# Altium PCB ImpactNode.PcbDoc
Units mm, origin at the board's own origin, x right, y up, seen from the top; angles counter-clockwise.
Board outline 55.45 x 36 mm, 4 copper layers (L1 (SIgnal), L2 (GND), L3 (GND), L4 (SIgnal)), stack 1.57 mm thick; 42 components, 32 nets, 160 pads, 95 vias.
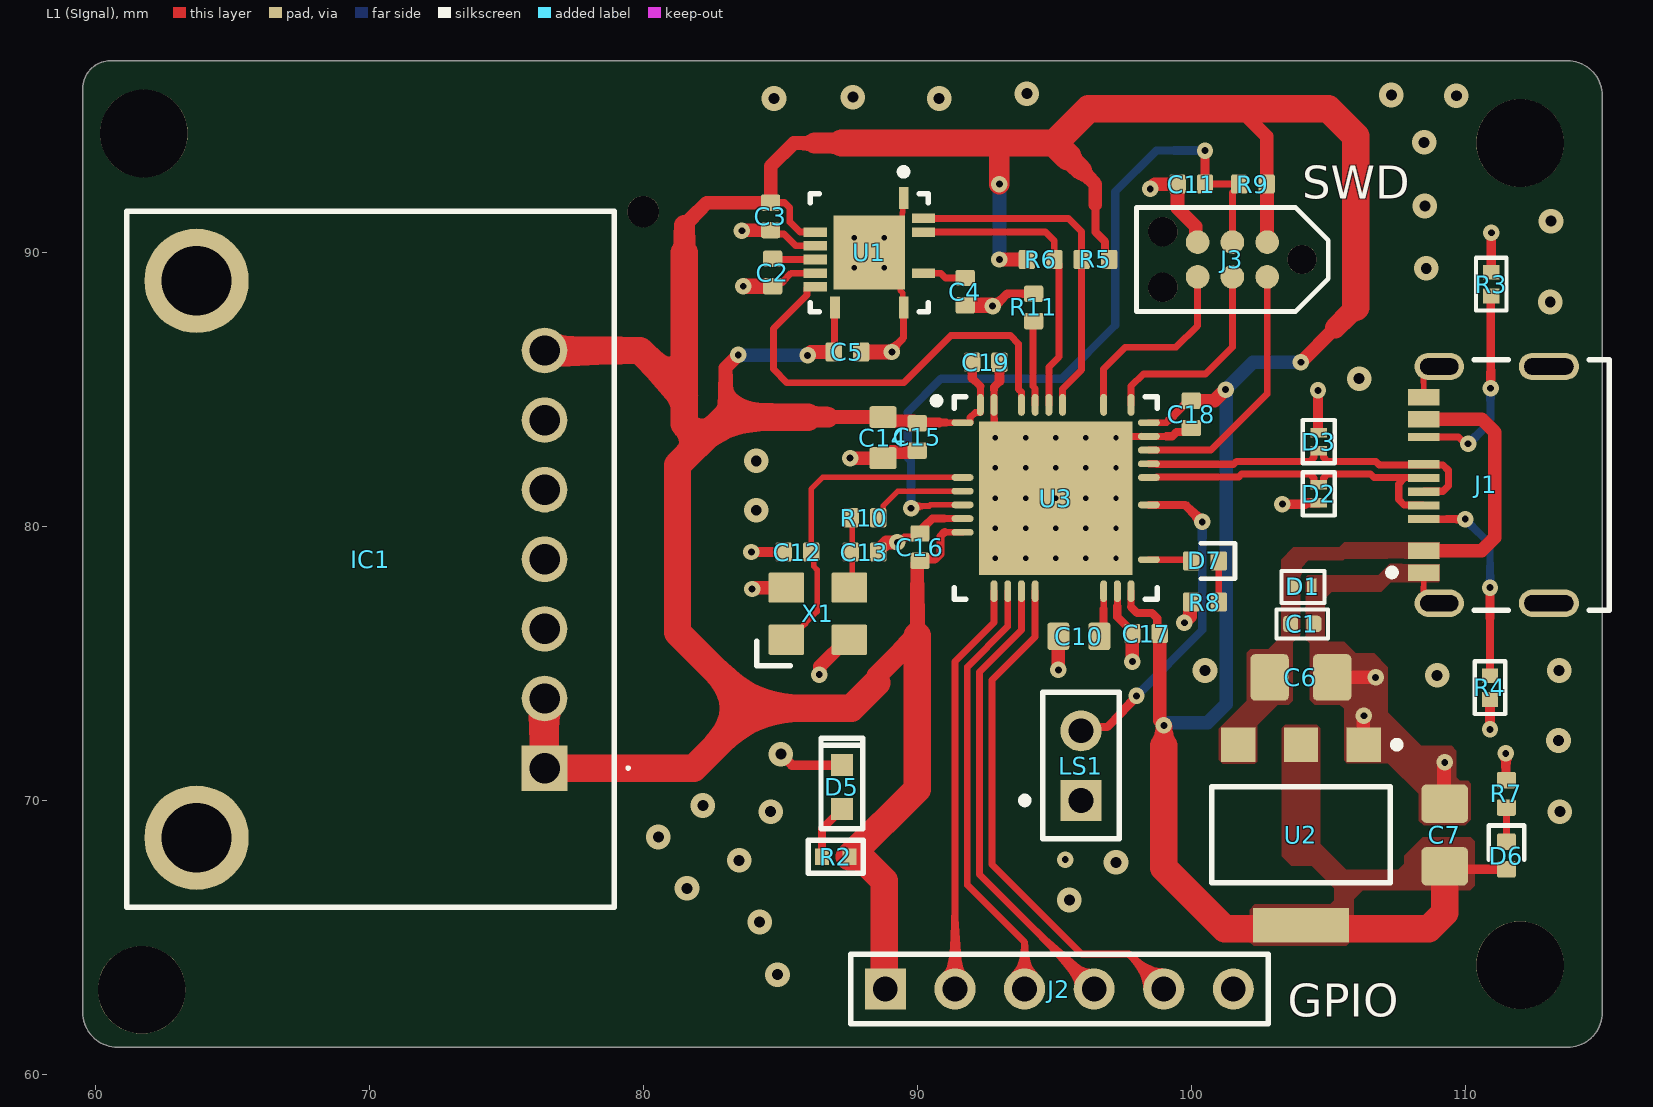
[diagram p0: L1 (SIgnal) view]
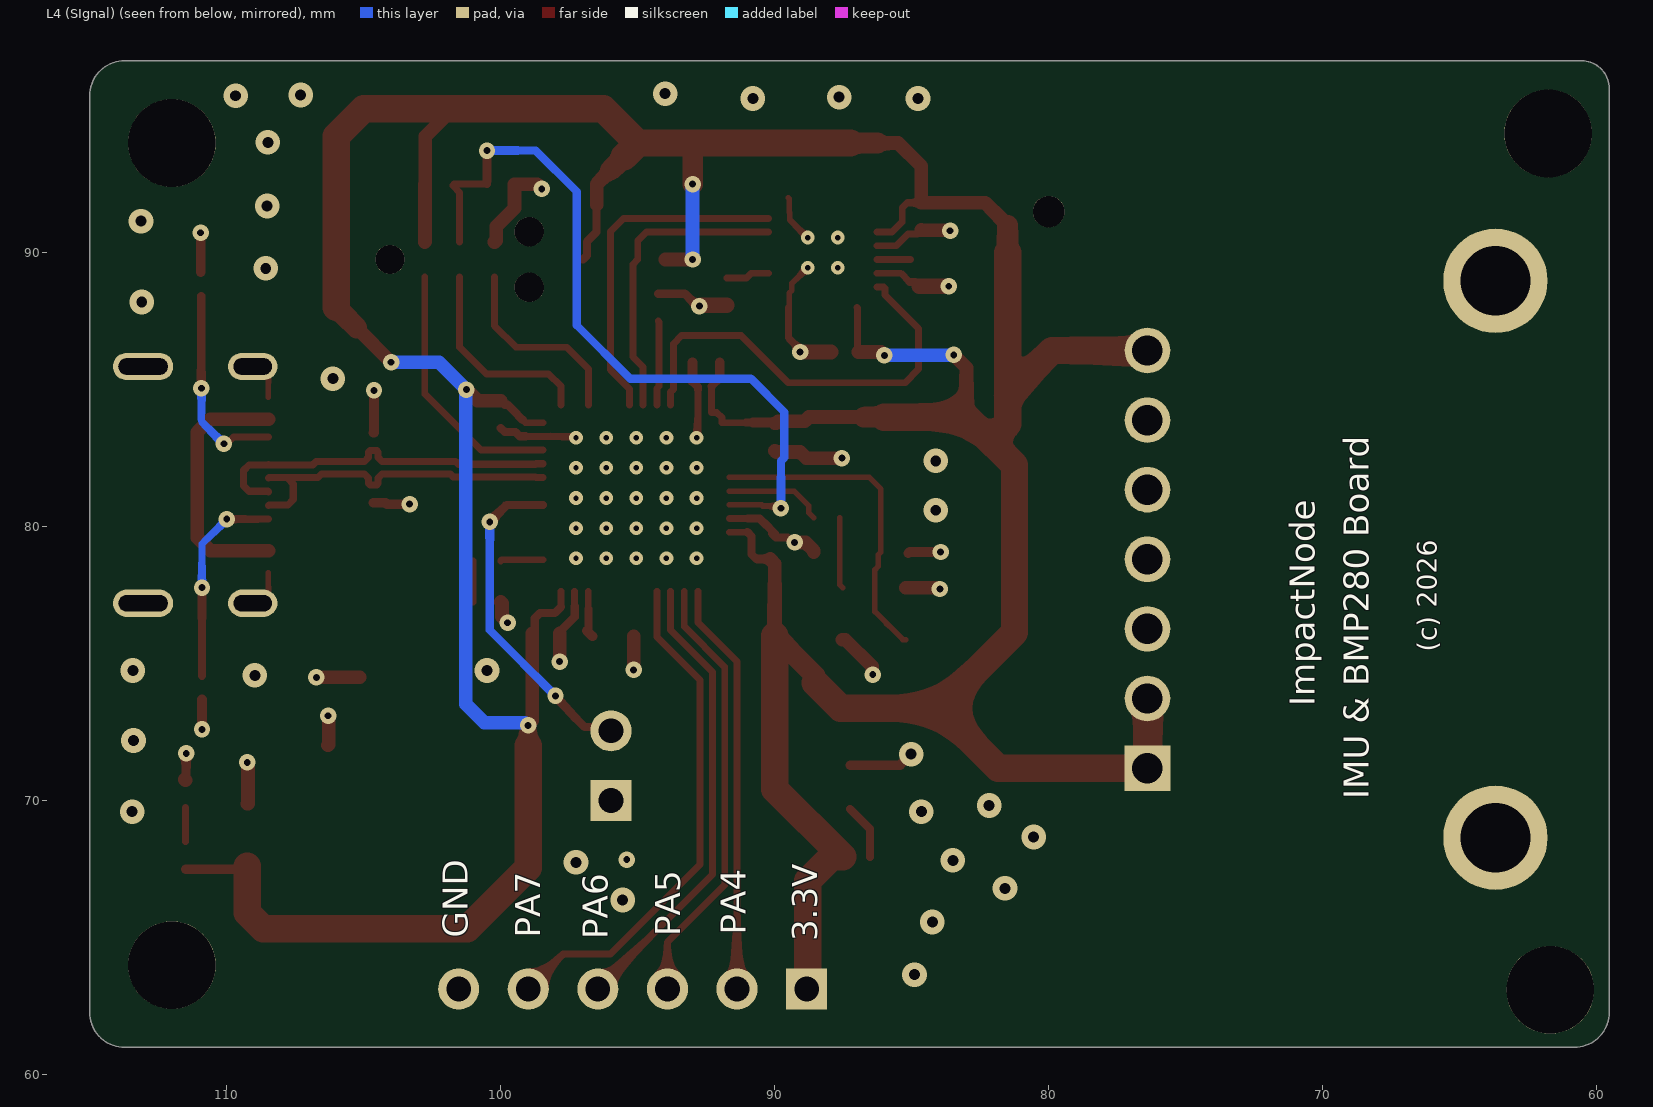
[diagram p1: L4 (SIgnal) view, seen from below]
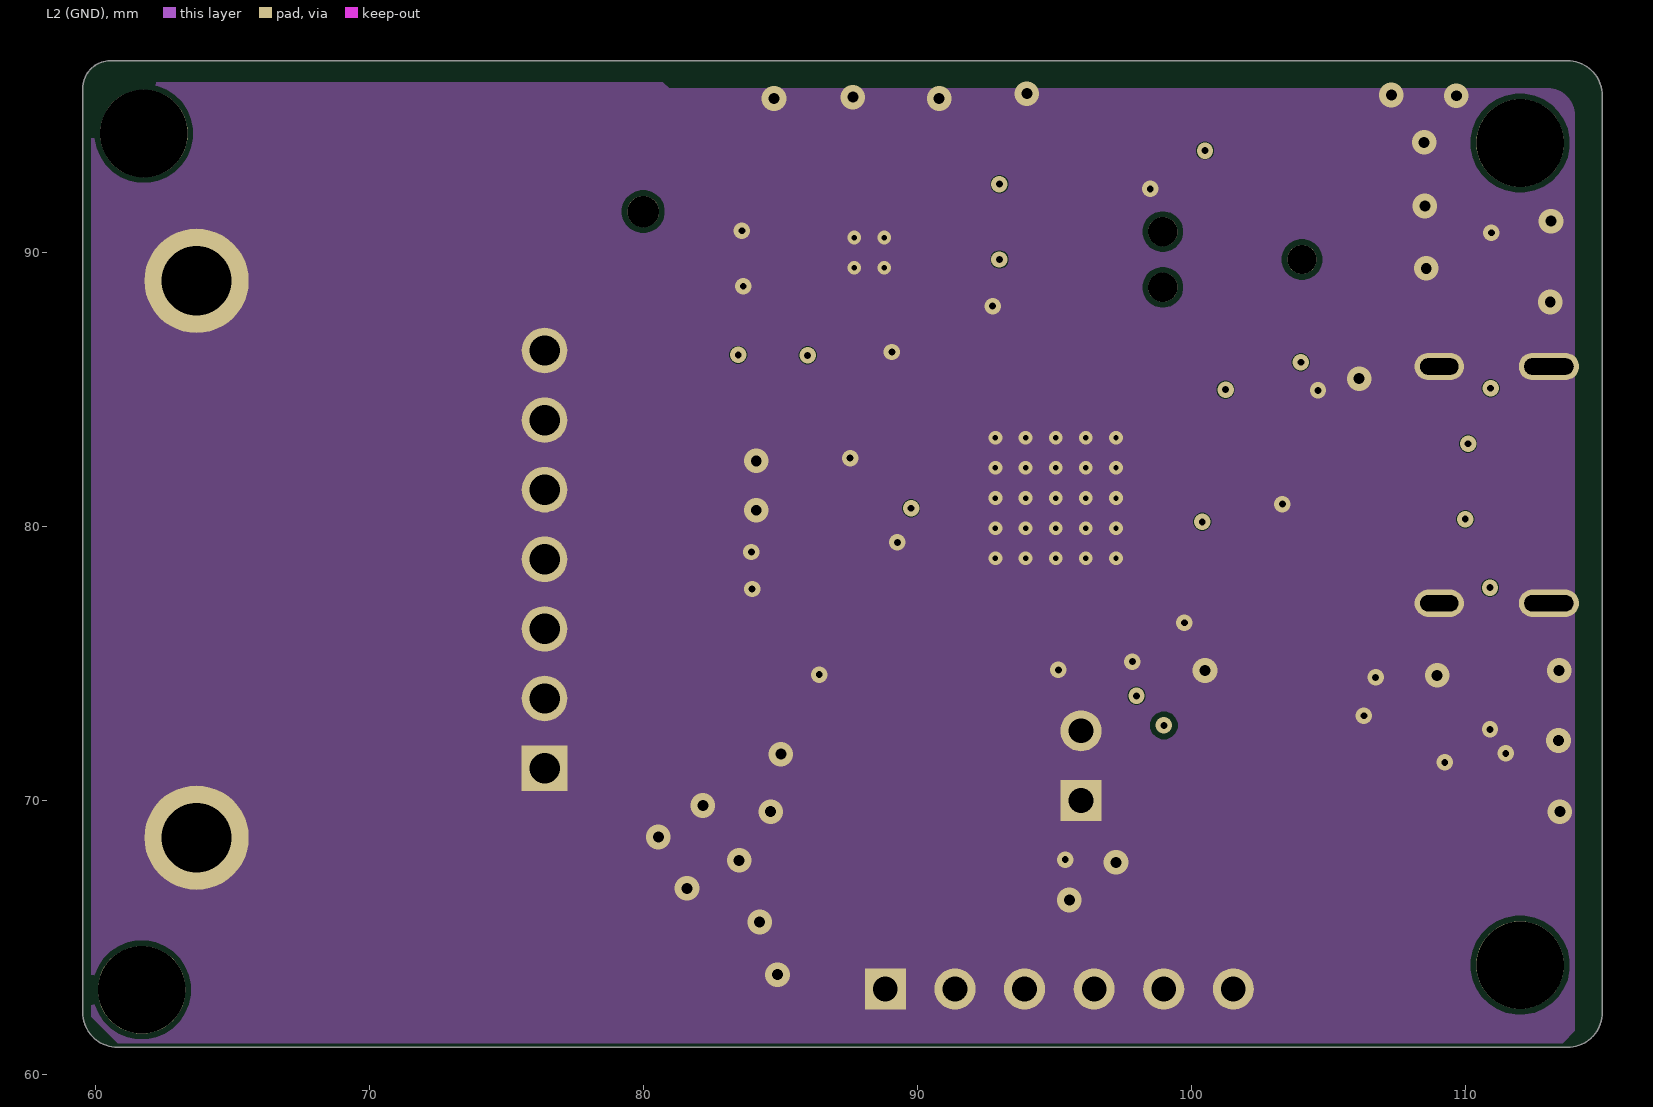
[diagram p2: L2 (GND)]
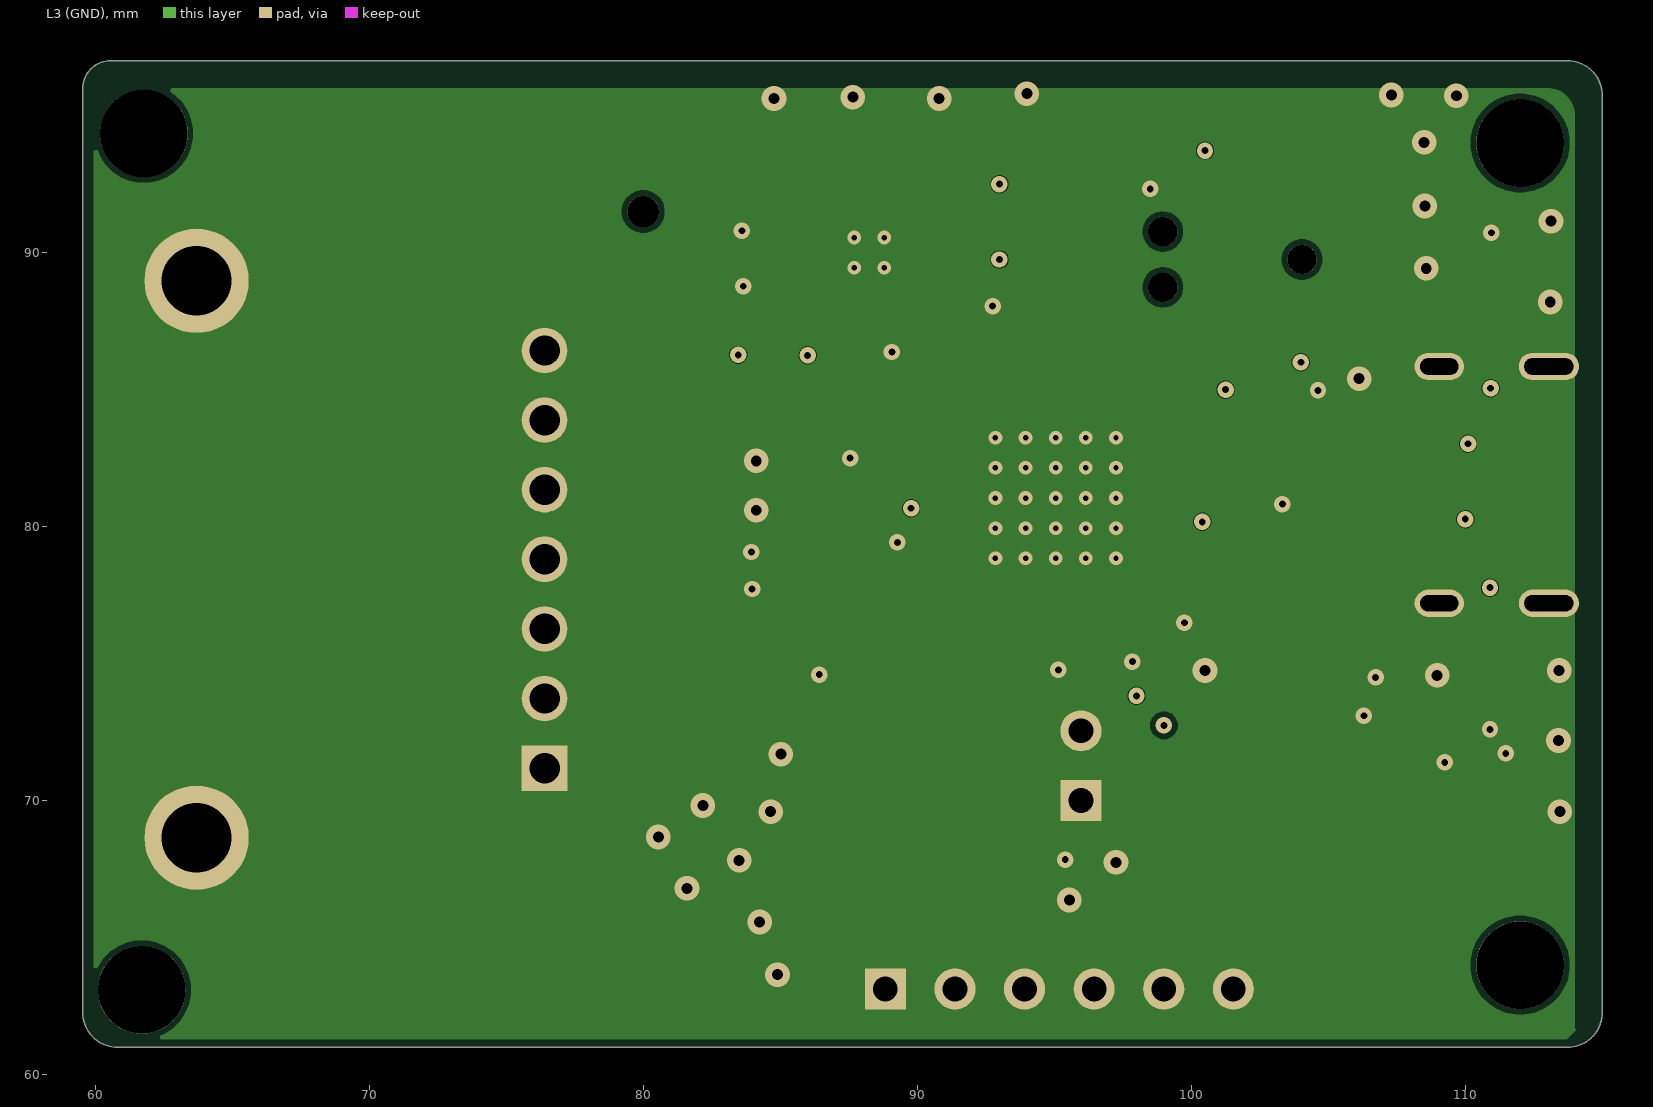
[diagram p3: L3 (GND)]
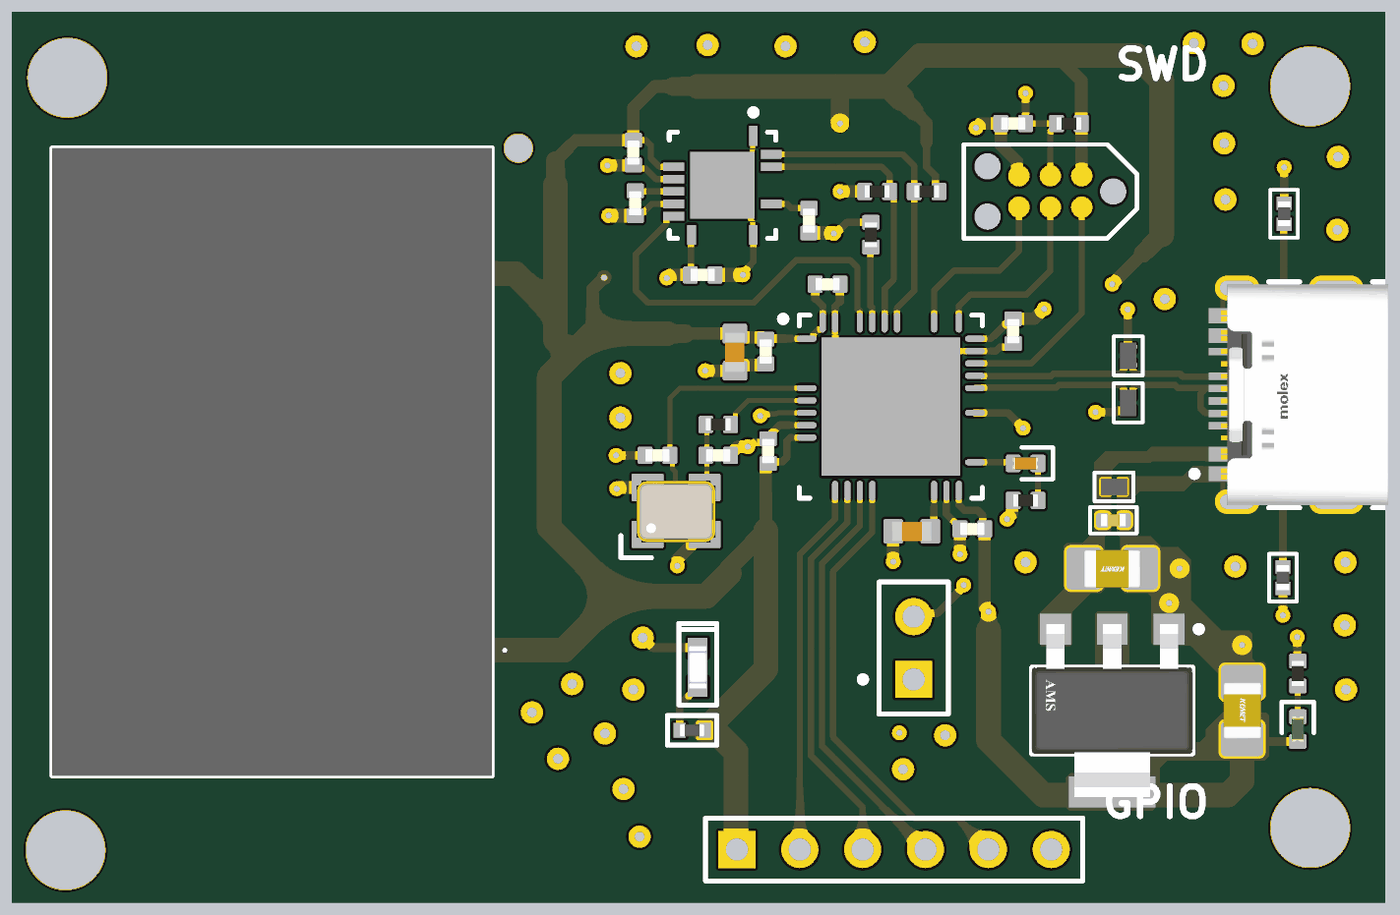
[diagram p4: 3D render of the assembled board from above, using the file's embedded part models]

## Layer stack, top to bottom
Top Solder: solder mask 0.0254, SM-001, Dk 4
L1 (SIgnal): signal copper 0.035
Dielectric 1: prepreg 0.2, PP-017, Dk 4.6
L2 (GND): signal copper 0.0175
Dielectric 3: core 1.065, Core-039, Dk 4.6
L3 (GND): signal copper 0.0175
Dielectric 5: prepreg 0.2, PP-017, Dk 4.6
L4 (SIgnal): signal copper 0.035
Bottom Solder: solder mask 0.0254, SM-001, Dk 4

## Board outline
59.55,62.27 59.55,96 cw(c60.55,96) 60.55,97 60.5,97 113.73,97 cw(c113.73,95.73) 115,95.73 115,62.27 cw(c113.73,62.27) 113.73,61 60.775,61 60.82,61 cw(c60.82,62.27)

## Design rules (kind name [scope] priority, off if disabled: settings)
Clearance [All] p1: gap=0.2 ignorepadtopadclearanceinfootprint=TRUE
DiffPairsRouting [All] p1: maxlimit=0.254 minlimit=0.203 mostfreqgap=0.254 toplayer_maxgap=0.203 toplayer_prefgap=0.203 toplayer_minwidth=0.26 toplayer_maxwidth=0.26 toplayer_prefwidth=0.26 bottomlayer_maxgap=0.203 bottomlayer_prefgap=0.203 bottomlayer_minwidth=0.26 bottomlayer_maxwidth=0.26 bottomlayer_prefwidth=0.26 impedanceprofiledriven=TRUE impedanceprofileid={7F84C1FC-614D-44AF-B792-7ED8B26A1299} impedanceprofilevalue=90.000000 maxuncoupledlength=12.7
HoleSize [All] p1: absolutevalues=TRUE maxlimit=3.5 minlimit=0.025 maxpercent=80.000 minpercent=20.000
MinimumSolderMaskSliver [All] p1: minsoldermaskwidth=0.02
PolygonConnect [All] p1: connectstyle=Direct reliefconductorwidth=0.254 reliefentries=4 polygonreliefangle="90 Angle" airgapwidth=0.254
RoutingVias [All] p1: holewidth=0.3 width=0.7 viastyle="Through Hole" minholewidth=0.25 minwidth=0.55 maxholewidth=0.4 maxwidth=0.9
SilkToSilkClearance [All] p1: silktosilkclearance=0.15
SilkToSolderMaskClearance [IsPad] p1: minsilkscreentomaskgap=0 clearancetoexposedcopper=TRUE
SolderMaskExpansion [All] p1: expansion=0.102 istentingtop=FALSE
UnRoutedNet [All] p1: checkbadconnections=TRUE
Width [All] p1: maxlimit=1 minlimit=0.2 preferedwidth=0.3 midlayer1_minwidth=0.254 midlayer1_maxwidth=0.254 midlayer1_prefwidth=0.254 midlayer2_minwidth=0.254 midlayer2_maxwidth=0.254 midlayer2_prefwidth=0.254 minimp=50.000000 maximp=50.000000 favimp=50.000000
24 further rules are at their usual default settings.

## Classes and differential pairs
differential pair class DIFF_USB: USB_D
differential pair class DIFF90: USB_D
differential pair USB_D: +USB_D_P -USB_D_N

## Components (designator, comment, footprint, x,y, rotation, side; value= is the part's Value field where it differs from the comment)
C1 "100nF, 50V" CAPC1005X55N 104.05,76.45 r180 top value=100nF
C2 "100n" CAP_0402 84.725,89.275 r90 top
C3 "100n" CAP_0402 84.65,91.325 r90 top
C4 "2n2" CAP_0402 91.75,88.575 r90 top
C5 "100n" CAP_0402 87.45,86.375 r180 top
C6 "22u" CAP_0805 104,74.5 r180 top
C7 "22u" CAP_0805 109.25,68.75 r270 top
C10 "2u2" CAP_0603 95.9,76 r0 top
C11 "100n" CAP_0402 100,92.5 r0 top
C12 "10p" CAP_0402 85.625,79.075 r0 top
C13 "10p" CAP_0402 88.075,79.075 r180 top
C14 "2u2" CAP_0603 88.75,83.25 r90 top
C15 "100n" CAP_0402 90,83.275 r90 top
C16 "100n" CAP_0402 90.1,79.25 r270 top
C17 "100n" CAP_0402 98.35,76.1 r0 top
C18 "100n" CAP_0402 100,84.1 r90 top
C19 "100n" CAP_0402 92.5,86 r180 top
D1 "AQ3045-01ETG" SOD882 104.075,77.8 r180 top
D2 "AQ3045-01ETG" SOD882 104.65,81.2 r90 top
D3 "AQ3045-01ETG" SOD882 104.65,83.1 r270 top
D5 "GREEN" LED_0603 87.25,70.5 r270 top
D6 "GREEN" LED_0402_GREEN 111.5,68 r90 top
D7 "RED" LED_0402_RED 100.5,78.75 r0 top
IC1 "Adafruit_BMP280" AdafruitBMP280 76.4,71.19 r90 top
J1 "217179-0001" FP-2171790001-MFG 111.9,81.525 r90 top
J2 "SM06B-GHS-TB" HDR1X6 88.835,63.129 r0 top
J3 "TC2030-NL" TC2030-NL-FP 101.5,89.75 r180 top
LS1 "buzzer" PIN2 95.975,70.01 r90 top
R2 "1kohm" R0402 87.025,67.95 r0 top value=1kR
R3 "5K1" RESC1005X37N 110.95,88.85 r270 top value=5.1kΩ
R4 "5K1" RESC1005X37N 110.9,74.125 r90 top value=5.1kΩ
R5 "2k2" RES_0402 96.5,89.75 r0 top
R6 "2k2" RES_0402 94.5,89.75 r180 top
R7 "1k" RES_0402 111.5,70.25 r270 top
R8 "1k" RES_0402 100.5,77.25 r0 top
R9 "10k" RES_0402 102.25,92.5 r0 top
R10 "0R" RES_0402 88.075,80.325 r0 top
R11 "10k" RES_0402 94.25,88 r270 top
U1 "MPU-6050" IS-QFN-24_V 88.25,90 r270 top
U2 "ams1117" FP-ams1117-IPC_C 104,68.75 r270 top
U3 "STM32F411CEU6" STM-UFQFPN48_L 95.053,81.045 r0 top
X1 "24MHz" XTAL_3225 86.375,76.825 r0 top

## Footprints (in the part's own frame and the unit in brackets; to place one, negate y for a bottom-side part, rotate by r counter-clockwise, add the part's x,y. Pads: shape width x height; smd on the part's side, far side on the other; paste and mask are expansions set on the pad)
AdafruitBMP280 [mm]
  rect 1.665x1.665 hole 1.11: 1(0,0)
  round 1.665 hole 1.11: 2(2.54,0) 3(5.08,0) 4(7.62,0) 5(10.16,0) 6(12.7,0) 7(15.24,0)
  round 3.81 hole 2.54: MH1(-2.54,12.7) MH2(17.78,12.7)
  silkscreen extent -5.08,-3.1 20.32,15.24, body extent -5.08,-2.54 20.32,15.24, height 3
CAP_0402 [mm]
  rrect25% 0.6x0.7 smd: 1(-0.5,0) 2(0.5,0)
  body extent -0.5,-0.26 0.5,0.26, height 0.37
CAP_0603 [mm]
  rrect25% 0.8x1 smd: 1(-0.75,0) 2(0.75,0)
  body extent -0.8,-0.4 0.8,0.4, height 0.51
CAP_0805 [mm]
  rrect25% 1.4x1.7 smd: 1(-1.143,0) 2(1.143,0)
  body extent -1.15,-0.76 1.15,0.79, height 1.01
CAPC1005X55N [mm]
  rrect53% 0.54x0.6 smd: 1(-0.43,0) 2(0.43,0)
  silkscreen extent -0.94,-0.53 0.94,0.53, body extent -0.5,-0.25 0.5,0.25, height 0.55
FP-2171790001-MFG [mm]
  rect 0.6x1.15 smd paste+0 mask+0: A1B12(-3.2,3.425) A4B9(-2.4,3.425) B1A12(3.2,3.425) B4A9(2.4,3.425)
  rect 0.3x1.15 smd paste+0 mask+0: A5(-1.25,3.425) A6(-0.25,3.425) A7(0.25,3.425) B5(1.75,3.425) B6(0.75,3.425) B7(-0.75,3.425)
  rrect100% 1x1.8 hole 1.4 slot 0.6 at 0 deg paste-2539.97 mask+0: S1(-4.32,2.85) S2(4.32,2.85)
  rrect100% 1x2.2 hole 1.8 slot 0.6 at 0 deg paste-2539.97 mask+0: S3(-4.32,-1.15) S4(4.32,-1.15)
  silkscreen extent -4.57,-3.35 4.57,4.7, body extent -4.92,-3.45 4.92,4.1, height 0.25
FP-ams1117-IPC_C [mm]
  rect 1.25x1.25 smd paste+0 mask+0: 1(-3.295,2.29) 2(-3.295,0) 3(-3.295,-2.29)
  rect 1.25x3.5 smd paste+0 mask+0: 4(3.295,0)
  silkscreen extent -3.42,-3.25 1.75,3.63, body extent -3.9,-3.35 3.9,3.35, height 0.25
HDR1X6 [mm] "Connector; Header; 6 Position"
  rect 1.5x1.5 hole 0.9: 1(0,0)
  round 1.5 hole 0.9: 2(2.54,0) 3(5.08,0) 4(7.62,0) 5(10.16,0) 6(12.7,0)
  silkscreen extent -1.27,-1.27 13.97,1.27
IS-QFN-24_V [mm] "QFN, 24-Leads, Body 4x4mm, Pitch 0.5mm, Thermal Pad 2.7x2.6mm"
  rect 0.8x0.35 smd: 1(-2,1.25) 13(2,-1.25) 18(2,1.25)
  rect 0.35x0.85 smd mask+0.102: 8(-0.75,-1.975) 9(-0.25,-1.975) 10(0.25,-1.975) 11(0.75,-1.975) 12(1.25,-1.975) 20(0.75,1.975) 23(-0.75,1.975) 24(-1.25,1.975)
  rect 2.7x2.6 smd: 25(0,0)
  silkscreen extent -3.07,-2.15 2.15,2.15, body extent -2,-2 2,2, height 0.95
LED_0402_GREEN [mm]
  rrect25% 0.6x0.7 smd: A(-0.5,0) K(0.5,0)
  silkscreen extent -0.15,-0.65 1.1,0.65, body extent -0.51,-0.25 0.51,0.25, height 0.45
LED_0402_RED [mm]
  rrect25% 0.6x0.7 smd: A(-0.5,0) K(0.5,0)
  silkscreen extent -0.15,-0.65 1.1,0.65, body extent -0.51,-0.25 0.51,0.25, height 0.45
LED_0603 [mm]
  rect 0.8x0.8 smd: 1(-0.8,0) 2(0.8,0)
  silkscreen extent -1.78,-0.76 1.52,0.76, body extent -0.85,-0.4 0.85,0.4, height 0.66
PIN2 [mm] "Photosensitive Diode; 2 Leads"
  rect 1.5x1.5 hole 0.9: 1(0,0)
  round 1.5 hole 0.9: 2(2.54,0)
  silkscreen extent -1.4,-1.4 3.94,2.17
R0402 [mm]
  rect 0.5x0.6 smd: 1(-0.5,0) 2(0.5,0)
  silkscreen extent -1,-0.6 1,0.6, body extent -0.5,-0.25 0.5,0.25, height 0.4
RES_0402 [mm]
  rrect25% 0.6x0.7 smd: 1(-0.5,0) 2(0.5,0)
  body extent -0.5,-0.25 0.5,0.25, height 0.3
RESC1005X37N [mm]
  rect 0.54x0.6 smd: 1(-0.432,0) 2(0.432,0)
  silkscreen extent -0.97,-0.56 0.97,0.56, body extent -0.5,-0.25 0.5,0.25, height 0.37
SOD882 [mm]
  rect 0.35x0.6 smd: 1(-0.325,0) 2(0.325,0)
  silkscreen extent -0.79,-0.58 0.79,0.58, body extent -0.54,-0.34 0.54,0.34, height 0.44
STM-UFQFPN48_L [mm] "QFN, 48-Leads, Body 7.1x7.1mm, Pitch 0.5mm, Thermal Pad 5.6x5.6mm, IPC High Density"
  oval 0.8x0.25 smd: 1(-3.4,2.75) 5(-3.4,0.75) 6(-3.4,0.25) 7(-3.4,-0.25) 8(-3.4,-0.75) 9(-3.4,-1.25) 26(3.4,-2.25) 30(3.4,-0.25) 32(3.4,0.75) 33(3.4,1.25) 34(3.4,1.75) 35(3.4,2.25) 36(3.4,2.75)
  oval 0.25x0.8 smd: 14(-2.25,-3.4) 15(-1.75,-3.4) 16(-1.25,-3.4) 17(-0.75,-3.4) 22(1.75,-3.4) 23(2.25,-3.4) 24(2.75,-3.4) 37(2.75,3.4) 39(1.75,3.4) 42(0.25,3.4) 43(-0.25,3.4) 44(-0.75,3.4) 45(-1.25,3.4) 47(-2.25,3.4) 48(-2.75,3.4)
  rect 5.6x5.6 smd: 49(0,0)
  silkscreen extent -4.47,-3.7 3.7,3.7, body extent -3.55,-3.55 3.55,3.55, height 0.6
TC2030-NL-FP [mil]
  round 33.98 smd paste-16.99: 1(-50,-25) 2(-50,25) 3(0,-25) 4(0,25) 5(50,-25) 6(50,25)
  round 42.01 hole 42.01 unplated: MH(-100,0) MH(100,-40) MH(100,40)
  silkscreen extent -138,-75 138,75
XTAL_3225 [mm]
  rrect10% 1.3x1.1 smd: 1(-1.15,-0.95) 2(1.15,-0.95) 3(1.15,0.95) 4(-1.15,0.95)
  silkscreen extent -2.23,-1.89 -1,-1, body extent -1.6,-1.28 1.6,1.22, height 0.61

## Part data
C1: library part CL05B104KB5NNNC, "CAP CER 0.1UF 50V X7R 0402", Case/Package=0402, Dielectric=X7R, Dielectric Material=Ceramic, Manufacturer="Samsung Electro-Mechanics", Max Operating Temperature=125°C, Min Operating Temperature=-55°C, Supplier Part Number=1276-CL05B104KB5NNNCCT-ND, Tolerance=10%, Voltage Rating=50V, Category="Ceramic Capacitors", China RoHS=Compliant, ComponentLink1Description=https://datasheet.octopart.com:443/CL05B104KB5NNNC-Samsung-Electro-Mechanics-datasheet-141346860.pdf?src-supplier=IHS, ComponentLink1URL=https://datasheet.octopart.com:443/CL05B104KB5NNNC-Samsung-Electro-Mechanics-datasheet-141346860.pdf?src-supplier=IHS, ComponentLink2Description=https://datasheet.octopart.com:443/CL05B104KB5NNNC-Samsung-datasheet-97040617.pdf?src-supplier=Future+Electronics, ComponentLink2URL=https://datasheet.octopart.com:443/CL05B104KB5NNNC-Samsung-datasheet-97040617.pdf?src-supplier=Future+Electronics, ComponentLink3Description=https://datasheet.octopart.com:443/CL05B104KB5NNNC-Samsung-datasheet-8326407.pdf?src-supplier=TME, ComponentLink3URL=https://datasheet.octopart.com:443/CL05B104KB5NNNC-Samsung-datasheet-8326407.pdf?src-supplier=TME, Height=550µm, LCSC Part Number=CL05B104KB5NNNC, Lifecycle Status=Production, Manufacturer Part Number=CL05B104KB5NNNC, Material=Ceramic, Mounting Technology="Surface Mount", Number of Terminals=2, Pricing="1=0.08, 10=0.010, 50=0.0088, 100=0.008 (USD)", REACH SVHC=Yes, RoHS=Compliant, Stock=1636938, Supplier=DigiKey, Voltage Rating (DC)=50V
C2 C3 C4 C12 C13: library part CAP_0402, "Capacitor SMD 0402 16V"
C5 C11 C15 C16 C17 C18 C19: library part CAP_0402, "Capacitor SMD 0402"
C6 C7: library part CAP_0805, "Capacitor SMD 0805 16V"
C10 C14: library part CAP_0603, "Capacitor SMD 0603"
D1 D2 D3: "Bi 30Kv 5V 0.35Pf Automotve Tvs Sod882/ T&r Rohs Compliant: Yes", Breakdown Voltage=7.8V, Clamping Voltage=12V, Leakage Current=100nA, Manufacturer=Littelfuse, Max Breakdown Voltage=9V, Max Operating Temperature=150°C, Min Breakdown Voltage=6.8V, Min Operating Temperature=-40°C, Operating Supply Voltage=5.3V, Peak Pulse Power=40W, Supplier Part Number=F9321CT-ND, Category="TVS Diodes", ComponentLink1Description=https://datasheet.octopart.com:443/AQ3045-01ETG-Littelfuse-datasheet-180606588.pdf?src-supplier=IHS, ComponentLink1URL=https://datasheet.octopart.com:443/AQ3045-01ETG-Littelfuse-datasheet-180606588.pdf?src-supplier=IHS, ComponentLink2Description=https://datasheet.octopart.com:443/AQ3045-01ETG-Littelfuse-datasheet-140480283.pdf?src-supplier=ODG+(Origin+Data+Global), ComponentLink2URL=https://datasheet.octopart.com:443/AQ3045-01ETG-Littelfuse-datasheet-140480283.pdf?src-supplier=ODG+(Origin+Data+Global), ComponentLink3Description=https://datasheet.octopart.com:443/AQ3045-01ETG-Littelfuse-datasheet-101609968.pdf?src-supplier=Farnell, ComponentLink3URL=https://datasheet.octopart.com:443/AQ3045-01ETG-Littelfuse-datasheet-101609968.pdf?src-supplier=Farnell, ComponentLink4Description=https://datasheet.octopart.com:443/AQ3045-01ETG-Littelfuse-datasheet-183003566.pdf?src-supplier=JRH+Electronics, ComponentLink4URL=https://datasheet.octopart.com:443/AQ3045-01ETG-Littelfuse-datasheet-183003566.pdf?src-supplier=JRH+Electronics, ComponentLink5Description=https://datasheet.octopart.com:443/AQ3045-01ETG-Littelfuse-datasheet-170904929.pdf?src-supplier=Future+Electronics, ComponentLink5URL=https://datasheet.octopart.com:443/AQ3045-01ETG-Littelfuse-datasheet-170904929.pdf?src-supplier=Future+Electronics, Lifecycle Status=Production, Manufacturer Part Number=AQ3045-01ETG, Mounting Technology="Surface Mount", Number of Channels=1, Number of Elements=1, Number of Terminals=2, Packaging="Cut Tape", Peak Reverse Current=100nA, Polarity=Bidirectional, Pricing="1=0.43, 10=0.271, 100=0.141, 500=0.131 (USD)", REACH SVHC=Yes, Reverse Standoff Voltage=5.3V, RoHS=Compliant, Stock=11182, Supplier=DigiKey
D5: library part VLMG1500-GS08, "Single Color LED, Yellow Green, 0.5mm", Color=Green,Yellow, Color@wavelength=Green, Forward Current=30mA, Forward Voltage=2.4V, LCSC Part Number=C511404, Manufacturer=Vishay, Max Operating Temperature=85°C, Min Operating Temperature=-30°C, Reverse Voltage-Max=5V, Supplier Part Number=VLMG1500-GS08DKR-ND, Category=LEDs, Channels=1, ComponentLink1Description=https://datasheet.ciiva.com:443/pdfs/VipMasterIC/IC/VISH/VISH-S-A0003457490/VISH-S-A0003457490-1.pdf?src-supplier=IHS+Markit, ComponentLink1URL=https://datasheet.ciiva.com:443/pdfs/VipMasterIC/IC/VISH/VISH-S-A0003457490/VISH-S-A0003457490-1.pdf?src-supplier=IHS+Markit, ComponentLink2Description=https://datasheet.ciiva.com/12071/vlmo1500-244705-12071911.pdf?src-supplier=Mouser, ComponentLink2URL=https://datasheet.ciiva.com/12071/vlmo1500-244705-12071911.pdf?src-supplier=Mouser, ComponentLink3Description=https://datasheet.ciiva.com/13945/vlmo1500-13945360.pdf?src-supplier=Digikey, ComponentLink3URL=https://datasheet.ciiva.com/13945/vlmo1500-13945360.pdf?src-supplier=Digikey, ComponentLink4Description=https://datasheet.ciiva.com/30005/vlmo1500-30005134.pdf?src-supplier=Avnet, ComponentLink4URL=https://datasheet.ciiva.com/30005/vlmo1500-30005134.pdf?src-supplier=Avnet, ComponentLink5Description=https://datasheet.ciiva.com/13945/vlmo1500-13945358.pdf?src-supplier=Digikey, ComponentLink5URL=https://datasheet.ciiva.com/13945/vlmo1500-13945358.pdf?src-supplier=Digikey, ComponentLink6Description=https://datasheet.ciiva.com/13945/vlmo1500-13945359.pdf?src-supplier=Digikey, ComponentLink6URL=https://datasheet.ciiva.com/13945/vlmo1500-13945359.pdf?src-supplier=Digikey, Luminous Intensity-Nom=90mcd, Manufacturer Part Number=VLMG1500-GS08, Mounting Technology="Surface Mount", Optoelectronic Device Type="SINGLE COLOR LED", Overall Height=0.35mm, Packaging="Tape and Reel", Pins=2, Pricing="1=0.33, 10=0.189, 100=0.1166, 500=0.08838, 1000=0.07977 (USD)", Reach SVHC Compliant=Yes, RoHS=Yes, RoHS Compliant=Yes, Shape=Rectangular, Size=0.5mm, Stock=48646, Supplier=Digikey, Terminal Pitch=0.95mm, Viewing Angle=130°
D6: library part LED_0402_GREEN, "LED 0402 GREEN SMD"
D7: library part LED_0402_RED, "LED 0402 RED SMD"
IC1: "Adafruit BMP280 Barometric Pressure + Temperature Sensor Breakout", Manufacturer_Name=Adafruit, Manufacturer_Part_Number="Adafruit BMP280", Description_="Adafruit BMP280 Barometric Pressure + Temperature Sensor Breakout", Height=2.9, Supplier=https://cdn-learn.adafruit.com/downloads/pdf/adafruit-bmp280-barometric-pressure-plus-temperature-sensor-breakout.pdf
J1: "USB Connector, USB Type C, USB 2.0, Receptacle, 16 Ways, Surface Mount, Through Hole Mount", Contact Resistance=50mΩ, Current Rating=1.25A, Dielectric Material=Polyamide, Insulation Resistance=100MΩ, LCSC Part Number=C3197684, Manufacturer=Molex, Max Operating Temperature=85°C, Min Operating Temperature=-40°C, Supplier Part Number=900-2171790001DKR-ND, Voltage Rating=30V, Category="USB Connectors", ComponentLink1Description=https://datasheet.octopart.com:443/217179-0001-Molex-datasheet-158871109.pdf?src-supplier=ODG+(Origin+Data+Global), ComponentLink1URL=https://datasheet.octopart.com:443/217179-0001-Molex-datasheet-158871109.pdf?src-supplier=ODG+(Origin+Data+Global), ComponentLink2Description=https://sigma.octopart.com:443/158871110/technical_drawing/Molex-217179-0001.pdf?src-supplier=Upverter, ComponentLink2URL=https://sigma.octopart.com:443/158871110/technical_drawing/Molex-217179-0001.pdf?src-supplier=Upverter, ComponentLink3Description=https://datasheet.octopart.com:443/217179-0001-Molex-datasheet-164573281.pdf?src-supplier=RS+(Formerly+Allied+Electronics), ComponentLink3URL=https://datasheet.octopart.com:443/217179-0001-Molex-datasheet-164573281.pdf?src-supplier=RS+(Formerly+Allied+Electronics), ComponentLink4Description=http://sigma.octopart.com:80/conflict_mineral_statement/Molex-company-72.pdf?src-supplier=Compliance+Statements, ComponentLink4URL=http://sigma.octopart.com:80/conflict_mineral_statement/Molex-company-72.pdf?src-supplier=Compliance+Statements, ComponentLink5Description=http://sigma.octopart.com:80/rohs_statement/Molex-company-73.pdf?src-supplier=Compliance+Statements, ComponentLink5URL=http://sigma.octopart.com:80/rohs_statement/Molex-company-73.pdf?src-supplier=Compliance+Statements, ComponentLink6Description=http://sigma.octopart.com:80/reach_statement/Molex-company-74.pdf?src-supplier=Compliance+Statements, ComponentLink6URL=http://sigma.octopart.com:80/reach_statement/Molex-company-74.pdf?src-supplier=Compliance+Statements, Contact Gender=Female, Contact Material="Gold, Nickel", Gender=Receptacle, Height=3.36mm, Lifecycle Status=Production, Manufacturer Part Number=217179-0001, Number of Contacts=16, Number of Ports=1, Number of Rows=1, Pins=16, Pricing="1=0.83, 10=0.704, 25=0.6596, 50=0.628, 100=0.598, 250=0.56052, 500=0.53374 (USD)", REACH SVHC=Yes, RoHS=Compliant, Shell Finish=Nickel, Shell Material="Stainless Steel", Stock=29627, Supplier=DigiKey, Terminal Pitch=500µm, Usb Standard="USB 2.0"
J2: "Header Connector 6 Position 1.25MM Pitch SMD Horizontal JST GH", Manufacturer=JST, Manufacturer Part Number=SM06B-GHS-TB
J3: "Tag-Connect No-Solder SWD Debug Connector (No Legs) DO NOT PLACE", Manufacturer=Tag-Connect, Manufacturer Part Number=TC2030-NL-FP
LS1: library part Bell, "Buzzer", LatestRevisionDate=17-Jul-2002, LatestRevisionNote="Re-released for DXP Platform.", PackageReference=PIN2, Published=24-Mar-1999, Publisher="Altium Limited"
R2: library part RC0402FR-071KL, "RES 1K OHM 1% 1/16W 0402", Case/Package=0402, LCSC Part Number=C106235, Manufacturer=Yageo, Max Operating Temperature=155°C, Min Operating Temperature=-55°C, Package Height=0.35mm, Package Length=1mm, Package Shape=Rectangular, Package Width=0.5mm, Power=62.5mW, Rated Temperature=70°C, Resistor Type="FIXED RESISTOR", Supplier Part Number=311-1.00KLRCT-ND, Temperature Coefficient (ppm/Cel)=100, Tolerance=1%, Working Voltage=50V, Additional Feature="LASER TRIMMABLE", Category="Chip SMD Resistors", ComponentLink1Description=https://datasheet.ciiva.com:443/pdfs/VipMasterIC/IC/YAGO/YAGO-S-A0008145938/YAGO-S-A0008145938-1.pdf?src-supplier=IHS+Markit, ComponentLink1URL=https://datasheet.ciiva.com:443/pdfs/VipMasterIC/IC/YAGO/YAGO-S-A0008145938/YAGO-S-A0008145938-1.pdf?src-supplier=IHS+Markit, ComponentLink2Description=https://datasheet.ciiva.com/11819/0900766b80c66297-11819477.pdf?src-supplier=Rs, ComponentLink2URL=https://datasheet.ciiva.com/11819/0900766b80c66297-11819477.pdf?src-supplier=Rs, ComponentLink3Description=https://datasheet.ciiva.com/7849/1018594-7849869.pdf?src-supplier=Element14, ComponentLink3URL=https://datasheet.ciiva.com/7849/1018594-7849869.pdf?src-supplier=Element14, ComponentLink4Description=https://datasheet.ciiva.com/7849/1018594-7849871.pdf?src-supplier=Element14, ComponentLink4URL=https://datasheet.ciiva.com/7849/1018594-7849871.pdf?src-supplier=Element14, ComponentLink5Description=https://datasheet.ciiva.com/7983/1018594-7983502.pdf?src-supplier=Element14, ComponentLink5URL=https://datasheet.ciiva.com/7983/1018594-7983502.pdf?src-supplier=Element14, ComponentLink6Description=https://datasheet.ciiva.com/22747/1018594-22747513.pdf?src-supplier=Element14, ComponentLink6URL=https://datasheet.ciiva.com/22747/1018594-22747513.pdf?src-supplier=Element14, ComponentLink7Description=https://datasheet.ciiva.com/17063/pyu-rc0402-51-rohs-l-6-r-17063193.pdf?src-supplier=Future+Electronics, ComponentLink7URL=https://datasheet.ciiva.com/17063/pyu-rc0402-51-rohs-l-6-r-17063193.pdf?src-supplier=Future+Electronics, ComponentLink8Description=https://datasheet.ciiva.com/12666/pyu-rc0402-51-rohs-l-6-r-12666741.pdf?src-supplier=Mouser, ComponentLink8URL=https://datasheet.ciiva.com/12666/pyu-rc0402-51-rohs-l-6-r-12666741.pdf?src-supplier=Mouser, Construction=Chip, JESD-609 Code=e3, Manufacturer Part Number=RC0402FR-071KL, Mounting Technology="Surface Mount", Packaging="Tape and Reel", Pins=2, Pricing="1=0.1, 10=0.007, 100=0.0061, 1000=0.0051, 2500=0.00408 (USD)", Reach SVHC Compliant=Yes, RoHS=Yes, RoHS Compliant=Yes, Stock=1739365, Supplier=Digikey, Technology="METAL GLAZE/THICK FILM", Terminal Finish=Nickel, Termination=Wraparound
R3 R4: library part AC0402FR-075K1L, "Res Thick Film 0402 5.1K Ohm 1% 0.063W(1/16W) ±100ppm/C Pad SMD Automotive T/R", Case Code (Imperial)=0402, Case Code (Metric)=1005, LCSC Part Number=C144745, Manufacturer="Yageo Group", Max Operating Temperature=155°C, Max Power Dissipation=63mW, Min Operating Temperature=-55°C, Power Dissipation=62.5mW, Supplier Part Number=YAG3503CT-ND, Temperature Coefficient=100ppm/°C, Tolerance=1%, Voltage Rating=50V, Case/Package=0402, Category="Chip SMD Resistors", China RoHS=Non-Compliant, ComponentLink1Description=https://datasheet.octopart.com:443/AC0402FR-075K1L-Yageo-datasheet-182189377.pdf?src-supplier=IHS, ComponentLink1URL=https://datasheet.octopart.com:443/AC0402FR-075K1L-Yageo-datasheet-182189377.pdf?src-supplier=IHS, ComponentLink2Description=https://datasheet.octopart.com:443/AC0402FR-075K1L-Yageo-datasheet-83209224.pdf?src-supplier=Upverter, ComponentLink2URL=https://datasheet.octopart.com:443/AC0402FR-075K1L-Yageo-datasheet-83209224.pdf?src-supplier=Upverter, ComponentLink3Description=https://datasheet.octopart.com:443/AC0402FR-075K1L-Yageo-datasheet-178509465.pdf?src-supplier=Newark, ComponentLink3URL=https://datasheet.octopart.com:443/AC0402FR-075K1L-Yageo-datasheet-178509465.pdf?src-supplier=Newark, ComponentLink4Description=https://datasheet.octopart.com/AC0402FR-075K1L-Yageo-datasheet-12512238.pdf, ComponentLink4URL=https://datasheet.octopart.com/AC0402FR-075K1L-Yageo-datasheet-12512238.pdf, ComponentLink5Description=https://datasheet.octopart.com:443/AC0402FR-075K1L-Yageo-datasheet-166720450.pdf?src-supplier=Future+Electronics, ComponentLink5URL=https://datasheet.octopart.com:443/AC0402FR-075K1L-Yageo-datasheet-166720450.pdf?src-supplier=Future+Electronics, ComponentLink6Description=https://datasheet.octopart.com:443/AC0402FR-075K1L-Yageo-datasheet-151884373.pdf?src-supplier=Future+Electronics, ComponentLink6URL=https://datasheet.octopart.com:443/AC0402FR-075K1L-Yageo-datasheet-151884373.pdf?src-supplier=Future+Electronics, ComponentLink7Description=https://datasheet.octopart.com:443/AC0402FR-075K1L-Yageo-datasheet-137699919.pdf?src-supplier=Future+Electronics, ComponentLink7URL=https://datasheet.octopart.com:443/AC0402FR-075K1L-Yageo-datasheet-137699919.pdf?src-supplier=Future+Electronics, ComponentLink8Description=https://datasheet.octopart.com:443/AC0402FR-075K1L-Yageo-datasheet-24580492.pdf?src-supplier=Future+Electronics, ComponentLink8URL=https://datasheet.octopart.com:443/AC0402FR-075K1L-Yageo-datasheet-24580492.pdf?src-supplier=Future+Electronics, ComponentLink9Description=https://datasheet.octopart.com:443/AC0402FR-075K1L-Yageo-datasheet-13029202.pdf?src-supplier=Future+Electronics, ComponentLink9URL=https://datasheet.octopart.com:443/AC0402FR-075K1L-Yageo-datasheet-13029202.pdf?src-supplier=Future+Electronics, ComponentLink10Description=https://datasheet.octopart.com:443/AC0402FR-075K1L-Yageo-Group-datasheet-164768995.pdf?src-supplier=ODG+(Origin+Data+Global), ComponentLink10URL=https://datasheet.octopart.com:443/AC0402FR-075K1L-Yageo-Group-datasheet-164768995.pdf?src-supplier=ODG+(Origin+Data+Global), ComponentLink11Description=http://sigma.octopart.com:80/rohs_statement/Yageo-company-2.pdf?src-supplier=Compliance+Statements, ComponentLink11URL=http://sigma.octopart.com:80/rohs_statement/Yageo-company-2.pdf?src-supplier=Compliance+Statements, ComponentLink12Description=http://sigma.octopart.com:80/conflict_mineral_statement/Yageo-company-3.pdf?src-supplier=Compliance+Statements, ComponentLink12URL=http://sigma.octopart.com:80/conflict_mineral_statement/Yageo-company-3.pdf?src-supplier=Compliance+Statements, Composition="Thick Film", Depth=500µm, Features="Automotive AEC-Q200, Moisture Resistant", Height=320µm, Lead Free="Lead Free", Length=990.6µm, Lifecycle Status=Production, Manufacturer Part Number=AC0402FR-075K1L, Military Standard=Not, Mounting Technology="Surface Mount", Number of Terminals=2, Number of Terminations=2, Power Rating=62.5mW, Pricing="1=0.1, 10=0.009, 25=0.008, 50=0.0072, 100=0.0066, 250=0.00576, 500=0.00406 (USD)", REACH SVHC=Yes, RoHS=Compliant, Schedule B="8533210045, 8533210045|8533210045|8533210045|8533210045|8533210045|8533210045|8533210045|8533210045|8533210045|8533210045|8533210045|8533210045|8533210045|8533210045|8533210045|8533210045|8533210045|8533210045|8533210045|8533210045|8533210045|8533210045|8533210045|85", Stock=29422, Supplier=DigiKey, Width=500µm, Working Voltage=50V
R5 R6 R7 R8 R9 R11: library part RES_0402, "Resistor SMD 0402"
R10: library part RES_0402, "Resistor SMD 0402 0R"
U1: library part CMP-1753-00002-2, "3-Axis Gyroscope, Accelerometer and a Digital Motion Processor(TM) (DMP), 2.375 to 3.46 V, -40 to 85 degC, 24-Pin QFN, RoHS, Tape and Reel", Manufacturer=InvenSense, Standard Package=5,000, Category=Sensors,Transducers, Datasheet URL=http://datasheet.octopart.com/MPU-6050-InvenSense-datasheet-14421344.pdf, Datasheet Version="Rev. 3.3, 05/2012", Dynamic Catalog=MPU-6000™Series, Family=Multifunction, Featured Product=MPU-60506-Axis,IntegratedI²CSolution, Manufacturer URL=http://www.invensense.com/, Online Catalog=MPU-6000™Series, Other Names="1428-1007-2 / MPU6050", Output Type=Digital, Sensor Type=MotionTracking, Unit PriceUSD=Digital
U2: library part CMP-209535-000002-1, "1A LOW DROPOUT VOLTAGE REGULATOR", RoHS Compliant=Yes
U3: library part CMP-0243-00165-1, "ARM Cortex-M4 32-bit MCU+FPU, 512 KB Flash, 128 KB RAM, 36 I/Os, 48-Pin UFQFPN, -40 to 85 degC, Tray", I/Os (High Current)=36, Operating Frequency(F) (Processor speed) (MHz)=100, Package Description=UFQFPN48, Package Reference="48-Pin Ultra Thin Fine Pitch Quad Flat No-Lead, 7 x 7 x 0.6 mm Body, 0.5 mm Pitch, Exposed Pad", Supply Voltage(Vcc) min (V)=1.7, ComponentLink1Description="Manufacturer URL", ComponentLink1URL=http://www.st.com/, ComponentLink2Description=Datasheet, ComponentLink2URL=http://www.st.com/st-web-ui/static/active/en/resource/technical/document/datasheet/DM00115249.pdf, Core="ARM Cortex-M4", DatasheetVersion="Rev. 6", FLASH Size (Prog) (kB)=512, Internal RAM Size (kB)=128, Mounting Technology="Surface Mount", Packing=Tray
X1: library part TSX-3225_24.0000MF15X-AC, "Crystal SMD 24MHz 10PPM 7pF 3225", Manufacturer=Epson, Manufacturer Part Number="TSX-3225 24.0000MF15X-AC"

## Free pads (board coordinates)
  round 3.2 hole 3.2: MH(61.7,63.1) MH(61.775,94.35) MH(112,64) MH(112,94)
  round 1.152 hole 1.152: TH(80,91.5)

## Via types
v1: diameter 0.6, hole 0.25, L1 (SIgnal) to L4 (SIgnal), 37 vias
v2: diameter 0.9, hole 0.4, L1 (SIgnal) to L4 (SIgnal), 29 vias
v3: diameter 0.5, hole 0.2, L1 (SIgnal) to L4 (SIgnal), 29 vias

## Nets (pads, with @x,y where several pads share a name; then routed paths per layer and width w, separated by ;. In a path a pad name is that pad's centre, name@x,y a point inside that pad or via, vN(x,y) a via of type N, cw(c..) or ccw(c..) an arc to the next point about the centre after c; other vN are vias at no path point)
+3V3: C3.2 C5.2 C7.2 C14.2 C15.2 C16.2 C17.2 C18.2 C19.2 D6.A IC1.1 IC1.2 IC1.7 J2.1 J3.1 R2.2 R5.2 R6.2 R9.2 U1.8 U1.13 U2.2 U2.4 U3.1 U3.9 U3.24 U3.36 U3.48 | length 184.9
  L1 (SIgnal) w0.25: C3.2 85.15,91.825 85.35,91.625 85.35,91.115 85.715,90.75 U1.8 ; C5.2 86.975,86.4 86.975,87.975 U1.13 ; 91,79.8 91.005,79.795 U3.9 ; 91.05,83.8 91.055,83.795 U3.1 91.928,83.795 91.928,83.979 92.118,84.17 92.303,84.17 U3.48 92.303,85.12 92.3,85.122 ; 97.8,77.075 97.803,77.078 U3.24 ; U3.36 99.095,83.795 99.2,83.9 ; C7.2 C7.2@109.357,67.5
  L1 (SIgnal) w0.3: C16.2@90.168,78.818 90.674,78.818 90.85,78.994 90.85,79.65 91,79.8 ; 90.8,83.8 91.05,83.8 ; 92,85.425 92.3,85.125 92.3,85.122 ; 96.5,91.75 96.5,90.75 96.85,90.4 96.85,89.9 R5.2 ; 97.8,77.075 98.025,76.85 98.567,76.85 98.762,76.655 98.762,76.188 C17.2 ; 99.2,83.901 99.549,84.25 ; 99.55,84.25 99.75,84.45 99.85,84.45 C18.2
  L1 (SIgnal) w0.35: C15.2 90.025,83.8 90.8,83.8 ; 92,85.425 C19.2 ; C7.2@109.357,67.5 D6.A
  L1 (SIgnal) w0.5: 81.5,91 82.325,91.825 C3.2 84.65,93.15 85.5,94 86.25,94 ; 83,84 83,85.8 v1(83.468,86.268) ; v1(86,86.25) 86.125,86.375 C5.2 ; 86.75,84 C14.2 88.9,83.85 89.875,83.85 89.95,83.775 C15.2 ; 90,76.025 90,78.65 C16.2 C16.2@90.168,78.818 ; v1(93,89.75) R6.2 ; 96,93 96.5,92.5 96.5,91.75 ; C17.2 98.85,72.927 99,72.777 v1(99,72.75) ; C18.2 100.85,84.6 v1(101.25,85) ; 102,95 102.75,94.25 R9.2 102.76,92.49 102.76,90.395 J3.1 ; v1(104,86) 105.25,87.25
  L1 (SIgnal) w0.6: 99,72 v1(99,72.75)
  L1 (SIgnal) w0.75: 81.5,90 81.5,91 ; 86,84 86.75,84 ; 86.25,94 87.25,94 ; 88.525,74.3 88.525,74.55 89.417,75.442 90,76.025 ; v1(93,92.5) 93,94 ; 95.5,93.5 96,93 ; 105.25,87.25 106,88
  L1 (SIgnal) w1: IC1.2 IC1.1 81.84,71.19 84.025,73.375 ; IC1.7 79.87,86.43 81.5,84.8 ; 81.5,90 81.5,84.8 ; 86,84 83,84 82.125,83.125 ; 87.25,94 93,94 95,94 ; 88.525,74.3 87.6,73.375 84.025,73.375 ; J2.1@88.875,63.129 88.8,63.204 88.8,67.075 87.925,67.95 R2.2 90,70.425 90,76.025 ; 95.5,93.5 95,94 ; 99,72 99,67.55 101.22,65.33 108.664,65.33 109.25,65.916 C7.2 ; 106,88 106,94.25 105.2,95.05 105,95.25 102.25,95.25 96.25,95.25 95,94 ; 81.5,84.8 81.5,83.75 82.125,83.125 ; 82.125,83.125 81.25,82.25 81.25,76.15 84.025,73.375
  L4 (SIgnal) w0.5: v1(83.468,86.268) 83.476,86.259 85.991,86.259 v1(86,86.25) ; v1(93,89.75) v1(93,92.5) ; v1(99,72.75) 99.027,72.75 99.127,72.85 100.6,72.85 101.275,73.525 101.275,84.904 101.269,84.91 101.269,84.981 v1(101.25,85) ; v1@101.231,84.981 102.25,86 v1(104,86)
+5V: C1.2 C6.2 D1.2 J1.A4B9 J1.B4A9 U2.3 | length 9.4
  L1 (SIgnal) w0.5: J1.A4B9 110.6,79.125 111.075,79.6 111.075,83.45 110.6,83.925 J1.B4A9
GND: C1.1 C2.1 C3.1 C4.1 C5.1 C6.1 C7.1 C10.1 C11.1 C12.1 C13.1 C14.1 C15.1 C16.1 C17.1 C18.1 C19.1 D1.1 D2.1 D3.1 D5.1 IC1.3 IC1.5 IC1.MH1 IC1.MH2 J1.A1B12 J1.B1A12 J1.S1 J1.S2 J1.S3 J1.S4 J2.6 J3.5 LS1.1 R3.1 R4.1 R7.1 R8.1 R11.1 U1.1 U1.9 U1.11 U1.18 U1.25 U2.1 U3.8 U3.23 U3.35 U3.47 U3.49 X1.2 X1.4 | length 55.6
  L1 (SIgnal) w0.2: v3(88.8,89.45) 89.375,88.875 89.375,88.625 89.475,88.524 89.475,88.025 U1.18 ; v3(88.8,90.55) 89.45,91.2 89.45,91.451 89.475,91.476 89.475,91.975 U1.1 ; J1.A1B12 108.475,77.596 108.866,77.205 J1.S1 ; J1.B1A12 108.475,85.454 108.866,85.845 J1.S2
  L1 (SIgnal) w0.25: C3.1 84.793,90.682 85.143,90.682 85.575,90.25 U1.9 ; 85.075,88.925 85.4,89.25 U1.11 ; v1(89.075,86.375) 89.075,86.47 89.5,86.895 U1.18 ; 90.975,80.3 90.98,80.295 U3.8 ; 92.8,85 92.803,84.997 U3.47 92.803,83.295 v3(92.853,83.245) ; v3(97.253,83.245) 97.303,83.295 U3.35 99.095,83.295 99.1,83.3 ; 97.3,77.1 97.303,77.103 U3.23
  L1 (SIgnal) w0.3: C2.1 84.875,88.925 85.075,88.925 ; v1(89.275,79.425) 89.356,79.425 89.531,79.6 89.95,79.6 C16.1 ; C16.1@90,79.75 90.55,80.3 90.975,80.3 ; v1(92.75,88.05) 92.831,88.05 93.281,88.5 R11.1 ; 92.8,85 92.8,85.1 93,85.3 ; 97.3,77.1 97.3,76.7 C17.1@97.85,76.15 ; 99.1,83.3 99.307,83.3 99.457,83.45 99.85,83.45 C18.1 ; v1(111.475,71.725) 111.488,71.712 111.488,70.813 R7.1@111.525,70.775
  L1 (SIgnal) w0.35: v1(83.95,79.075) 85.075,79.075 C12.1@85.125,79.025 ; v2(85.025,71.7) 85.425,71.3 D5.1 ; 93,85.3 C19.1 ; v1(103.325,80.825) 104.15,80.825 104.2,80.875 D2.1 ; v1(104.625,84.975) 104.625,83.425 D3.1 ; v1(110.9,72.6) R4.1 ; R3.1 v1(110.95,90.725)
  L1 (SIgnal) w0.5: v1(83.6,90.8) 83.612,90.813 84.638,90.813 C3.1 ; v1(83.975,77.725) 84.002,77.725 84.052,77.775 X1.4 ; v1(86.425,74.6) 86.444,74.619 86.444,74.894 87.425,75.875 X1.2 ; v1(87.55,82.5) C14.1 88.85,82.5 89.075,82.725 89.95,82.725 C15.1 ; C13.1 88.575,79.125 88.875,79.425 v1(89.275,79.425) ; v1(95.15,74.775) C10.1 ; v1@95.375,67.85 v1(95.4,67.85) ; v1(97.85,75.075) C17.1 ; v1(98.5,92.325) 98.675,92.5 C11.1 99.5,91.617 100.161,90.956 100.161,90.439 100.2,90.4 100.215,90.4 J3.5 ; v1(99.75,76.494) 99.75,76.521 99.95,76.721 99.95,77.2 R8.1 ; C6.1 v1(106.725,74.5) ; U2.1@106.29,72.035 U2.1 ; U2.1@106.3,72.025 106.275,72.05 106.275,73.125 v1(106.3,73.1) ; C7.1 109.232,69.893 109.225,69.9 109.225,71.375 v1(109.25,71.4) ; R7.1 R7.1@111.525,70.775
  L1 (SIgnal) w0.56: v1(83.65,88.775) C2.1 ; C5.1 v1(89.075,86.375) ; C4.1 92.714,88.075 92.739,88.05 v1(92.75,88.05)
  other v2: 84.9,63.65 84.25,65.575 95.55,66.375 81.6,66.8 97.25,67.75 83.5,67.825 80.55,68.675 84.65,69.6 113.45,69.6 82.175,69.825 113.4,72.2 108.975,74.575 100.5,74.75 113.425,74.75 84.125,80.6 84.125,82.4 106.125,85.4 113.1,88.2 108.575,89.425 113.125,91.15 108.525,91.7 108.5,94.025 84.775,95.625 90.8,95.625 87.65,95.675 109.675,95.725 107.3,95.75 94,95.8
  other v3: 92.853,78.845 93.953,78.845 95.053,78.845 96.153,78.845 97.253,78.845 92.853,79.945 93.953,79.945 95.053,79.945 96.153,79.945 97.253,79.945 92.853,81.045 93.953,81.045 95.053,81.045 96.153,81.045 97.253,81.045 92.853,82.145 93.953,82.145 95.053,82.145 96.153,82.145 97.253,82.145 93.953,83.245 95.053,83.245 96.153,83.245 87.7,89.45 87.7,90.55
I2C1_SCL: IC1.4
I2C1_SDA: IC1.6
IMU_CPOUT: C4.2 U1.20 | length 1.6
  L1 (SIgnal) w0.25: U1.20 90.85,89.25 91.025,89.075 C4.2
IMU_INT: U1.12 U3.45 | length 16
  L1 (SIgnal) w0.25: U1.12 86.025,88.75 85.975,88.7 85.975,88.45 84.75,87.225 84.75,85.75 85.25,85.25 89.5,85.25 91.225,86.975 93.4,86.975 93.7,86.675 93.7,85.014 93.803,84.911 U3.45
IMU_REGOUT: C2.2 U1.10 | length 1.2
  L1 (SIgnal) w0.25: C2.2@85.05,89.75 U1.10
IMU_SCL: R5.1 U1.24 U3.42 | length 12.6
  L1 (SIgnal) w0.25: U1.24 95.525,91.25 96,90.775 R5.1 96,85.725 95.303,85.028 U3.42
IMU_SDA: R6.1 U1.23 U3.43 | length 11.1
  L1 (SIgnal) w0.25: U1.23 94.675,90.75 95,90.425 R6.1 95.175,89.575 95.175,89.379 95.175,86.2 94.803,85.828 U3.43
LED_PWR_K: D6.K R7.2 | length 1.2
  L1 (SIgnal) w0.25: D6.K R7.2
"MCU BOOT0": R11.2 U3.44 | length 3.1
  L1 (SIgnal) w0.25: R11.2 94.225,87.475 94.225,85.125 94.303,85.047 U3.44
MCU_LED_A: D7.A U3.26 | length 1.6
  L1 (SIgnal) w0.25: U3.26 99.955,78.795 D7.A
MCU_LED_K: D7.K R8.2 | length 1.5
  L1 (SIgnal) w0.25: R8.2 D7.K
MCU_NRST: C11.2 J3.3 R9.1 U3.7 | length 27.8
  L1 (SIgnal) w0.2: v1(89.775,80.675) 89.85,80.75 90.43,80.75 90.475,80.795 U3.7
  L1 (SIgnal) w0.25: C11.2 101.7,92.5 101.75,92.45 101.5,92.2 J3.3
  L1 (SIgnal) w0.3: C11.2 v1(100.5,93.725)
  L4 (SIgnal) w0.3: v1(89.775,80.675) 89.775,82.403 89.65,82.528 89.65,84.175 90.875,85.4 95.275,85.4 97.225,87.35 97.225,92.225 98.725,93.725 v1(100.5,93.725)
MCU_OSC_IN: C12.2 U3.5 X1.1 | length 11.8
  L1 (SIgnal) w0.2: X1.1 85.325,75.875 86.35,76.9 86.35,78.425 86.228,78.547 86.228,78.972 C12.2 86.125,81.375 86.545,81.795 U3.5
MCU_OSC_OUT: R10.2 U3.6 | length 3.6
  L1 (SIgnal) w0.2: R10.2 88.765,80.515 88.765,80.765 89.295,81.295 U3.6
MCU_PA4: J2.2 U3.14 | length 15.1
  L1 (SIgnal) w0.25: J2.2 91.375,75.075 92.803,76.503 U3.14
MCU_PA5: J2.3 U3.15 | length 16
  L1 (SIgnal) w0.25: U3.15 93.303,77.37 93.3,77.367 93.3,76.361 91.825,74.886 91.825,66.925 93.915,64.835 J2.3
MCU_PA6: J2.4 U3.16 | length 16.9
  L1 (SIgnal) w0.25: U3.16 93.803,76.228 92.275,74.7 92.275,67.309 96.438,63.145 J2.4@96.438,63.112
MCU_PA7: J2.5 U3.17 | length 19.1
  L1 (SIgnal) w0.25: U3.17 94.303,75.978 92.725,74.4 92.725,67.675 96,64.4 97.724,64.4 J2.5 ; J2.5@98.954,63.207 ccw(c99.193,63.282) J2.5 ; J2.5@98.954,63.207 ccw(c99.193,63.282) J2.5 ; J2.5@98.954,63.207 ccw(c99.193,63.282) J2.5 ; J2.5@98.954,63.207 ccw(c99.193,63.282) J2.5
MCU_PA9: LS1.2 U3.30 | length 12.1
  L1 (SIgnal) w0.3: LS1.2 96.111,72.686 96.936,72.686 v1@98.025,73.775 ; U3.30 99.78,80.795 v1(100.4,80.175)
  L4 (SIgnal) w0.3: v1(98,73.825) 100.4,76.225 v1(100.4,80.175)
MCU_SWCLK: J3.4 U3.37 | length 7.5
  L1 (SIgnal) w0.25: U3.37 97.803,85.128 98.25,85.575 100.525,85.575 101.5,86.55 J3.4
MCU_SWDIO: J3.2 U3.34 | length 9.4
  L1 (SIgnal) w0.25: U3.34 100.72,82.795 102.77,84.845 J3.2
MCU_SWO: J3.6 U3.39 | length 7.2
  L1 (SIgnal) w0.25: U3.39 96.803,85.753 97.6,86.55 99.45,86.55 100.23,87.33 J3.6
MCU_VCAP1: C10.2 U3.22 | length 1.7
  L1 (SIgnal) w0.235: 96.8,77 96.803,77.003 U3.22
  L1 (SIgnal) w0.3: 96.8,77 96.8,76.25 C10.2@96.85,76.2
  L1 (SIgnal) w0.35: C10.2 C10.2@96.85,76.2
NetD5_2: D5.2 R2.1 | length 2.1
  L1 (SIgnal) w0.3: R2.1 86.525,68.975 D5.2
NetJ1_A5: J1.A5 R4.2 | length 7.6
  L1 (SIgnal) w0.25: J1.A5 v1(110,80.275)
  L1 (SIgnal) w0.3: R4.2 v1(110.9,77.775)
  L4 (SIgnal) w0.25: v1(110,80.275) 110.9,79.375 v1(110.9,77.775)
NetJ1_B5: J1.B5 R3.2 | length 7.5
  L1 (SIgnal) w0.25: J1.B5 109.755,83.275 110.005,83.025 v1(110.1,83.025)
  L1 (SIgnal) w0.3: v1(110.925,85.05) R3.2@110.925,88.418
  L4 (SIgnal) w0.25: v1(110.1,83.025) 110.925,83.85 v1(110.925,85.05)
USB_D_N: D2.2 J1.A7 J1.B7 U3.32 | length 12.5
  L1 (SIgnal) w0.26: U3.32 98.717,81.795 98.736,81.813 101.73,81.813 101.836,81.918 104.328,81.918 104.48,81.766 104.48,81.57 104.525,81.525 D2.2 104.775,81.525 104.82,81.57 104.82,81.766 104.972,81.918 106.54,81.918 106.665,81.793 108.457,81.793 J1.A7 ; 107.763,81.755 107.57,81.562 107.57,80.988 107.763,80.795 107.914,80.795 108.455,80.795 J1.B7
USB_D_P: D3.2 J1.A6 J1.B6 U3.33 | length 13.2
  L1 (SIgnal) w0.26: U3.33 98.717,82.295 98.736,82.276 101.538,82.276 101.644,82.382 104.328,82.382 104.48,82.534 104.48,82.73 104.525,82.775 D3.2 104.775,82.775 104.82,82.73 104.82,82.534 104.972,82.382 106.732,82.382 106.857,82.257 108.457,82.257 J1.B6 ; J1.A6 108.495,81.295 109.187,81.295 109.38,81.488 109.38,82.062 109.187,82.255 J1.B6@108.495,82.255
XTAL_IN: C13.2 R10.1 X1.3 | length 2.6
  L1 (SIgnal) w0.2: X1.3 87.625,77.875 87.625,79.075 R10.1@87.625,80.325
pads on no net: J3.MH

## Polygon pours and split planes (outlines as drawn)
GND on L1 (SIgnal) "GND_L01_P010" (solid, pour order 10): 105.425,73.5 105.575,73.35 105.575,71.475 105.675,71.375 107.175,71.375 108.3,70.25 108.3,69.275 108.475,69.1 110,69.1 110.2,69.3 110.2,70.625 110.1,70.725 109.8,70.725 109.675,70.85 109.675,71.825 109.5,72 108.4,72 107.175,73.225 107.175,74.875 106.675,75.375 106,75.375 105.575,75.8 105,75.8 104.875,75.925 104.875,77.375 105.125,77.625 106.925,77.625 107.275,77.975 109.025,77.975 109.075,78.025 109.075,78.625 109.05,78.65 107.25,78.65 106.825,78.225 104.25,78.225 104.175,78.15 104.175,75.9 104.325,75.75 104.325,73.675 104.5,73.5
+5V on L1 (SIgnal) "+5V_L01_P014" (solid, pour order 14): 109.075,79.425 105.575,79.425 105.4,79.25 103.725,79.25 103.275,78.8 103.275,76 102.8,75.525 102.15,75.525 102.025,75.4 102.025,73.65 101,72.625 101,71.5 101.15,71.35 102.325,71.35 102.4,71.425 102.4,72.75 103.15,73.5 103.55,73.5 103.7,73.65 103.7,75.775 104.025,76.1 104.025,78.525 104.275,78.775 105.55,78.775 105.6,78.825 109.075,78.825
+3V3 on L1 (SIgnal) "+3V3_L01_P007" (solid, pour order 7): 105.225,66.825 105.2,66.825 104.4,67.625 103.65,67.625 103.3,67.975 103.3,72.65 103.425,72.775 104.575,72.775 104.7,72.65 104.7,68.425 105.65,67.475 107.55,67.475 107.775,67.7 107.775,68 108.45,68.675 110.2,68.675 110.35,68.525 110.35,66.9 110.175,66.725 106.25,66.725 105.925,66.4 105.925,64.975 105.65,64.7 102.275,64.7 102.25,64.675 102.125,64.8 102.125,66.025 102.325,66.225 105.075,66.225 105.225,66.375
GND on L3 (GND) "GND_L03_P004" (solid, pour order 4): 80.902,95.995 59.945,95.995 59.9,95.95 59.95,95.9 59.95,61.95 60.6,61.3 113.7,61.3 114.05,61.65 114,61.7 113.995,62.902 ccw(c113.001,63) 114,63 114,95 ccw(c113,95) 113,96 81,96 ccw(c81,94.999)
GND on L2 (GND) "GND_L02_P003" (solid, pour order 3): 80.941,95.998 80.715,96.225 62.475,96.225 59.85,96.225 59.85,62.125 60.825,61.15 113.55,61.15 114,61.6 113.995,62.902 ccw(c113.007,63) 114,63 114,95 ccw(c113,95) 113,96 81,96 ccw(c81,95.006)

## Silkscreen, mask and mechanical layers (free items; w line width, h text height)
Top Overlay:
  text "SWD" at 104.05,91.975 h1.2
  text "GPIO" at 103.525,62.125 h1.2
Bottom Overlay:
  text "(c) 2026" at 65.85,75.434 h0.7 r270
  text "ImpactNode" at 70.3,73.451 h0.9 r270
  text "IMU & BMP280 Board" at 68.325,70.053 h0.9 r270
  text "PA4" at 91.05,65.1 h0.9 r270
  text "PA5" at 93.45,65.05 h0.9 r270
  text "PA7" at 98.55,65 h0.9 r270
  text "GND" at 101.2,65 h0.9 r270
  text "PA6" at 96.1,64.95 h0.9 r270
  text "3.3V" at 88.45,64.876 h0.9 r270
Mechanical 1:
  lines w0.254: 60.5,97 113.73,97 cw(c113.73,95.73) 115,95.73 115,62.27 cw(c113.73,62.27) 113.73,61 60.775,61 ; 60.55,97 ccw(c60.55,96) 59.55,96 59.55,62.27 ccw(c60.82,62.27) 60.82,61

## Text inside footprints (layer, text, board x,y; h text height)
D6: Mechanical 13 "+" at 110.992,66.117 h0.5 r90
D7: Mechanical 13 "+" at 98.617,79.258 h0.5
IC1: Mechanical 6 "%R" at 70.478,77.937 h1.27 r90